# Altium PCB PCB_LED_Board-7.PcbDoc
Units mil, origin at the board's own origin, x right, y up, seen from the top; angles counter-clockwise.
Board outline 1338.58 x 610.24 mil, 2 copper layers (Top Layer, Bottom Layer), stack 63.386 mil thick; 4 components, 5 nets, 15 pads, 0 vias.
Unrouted connection lines stored in the file: 5.
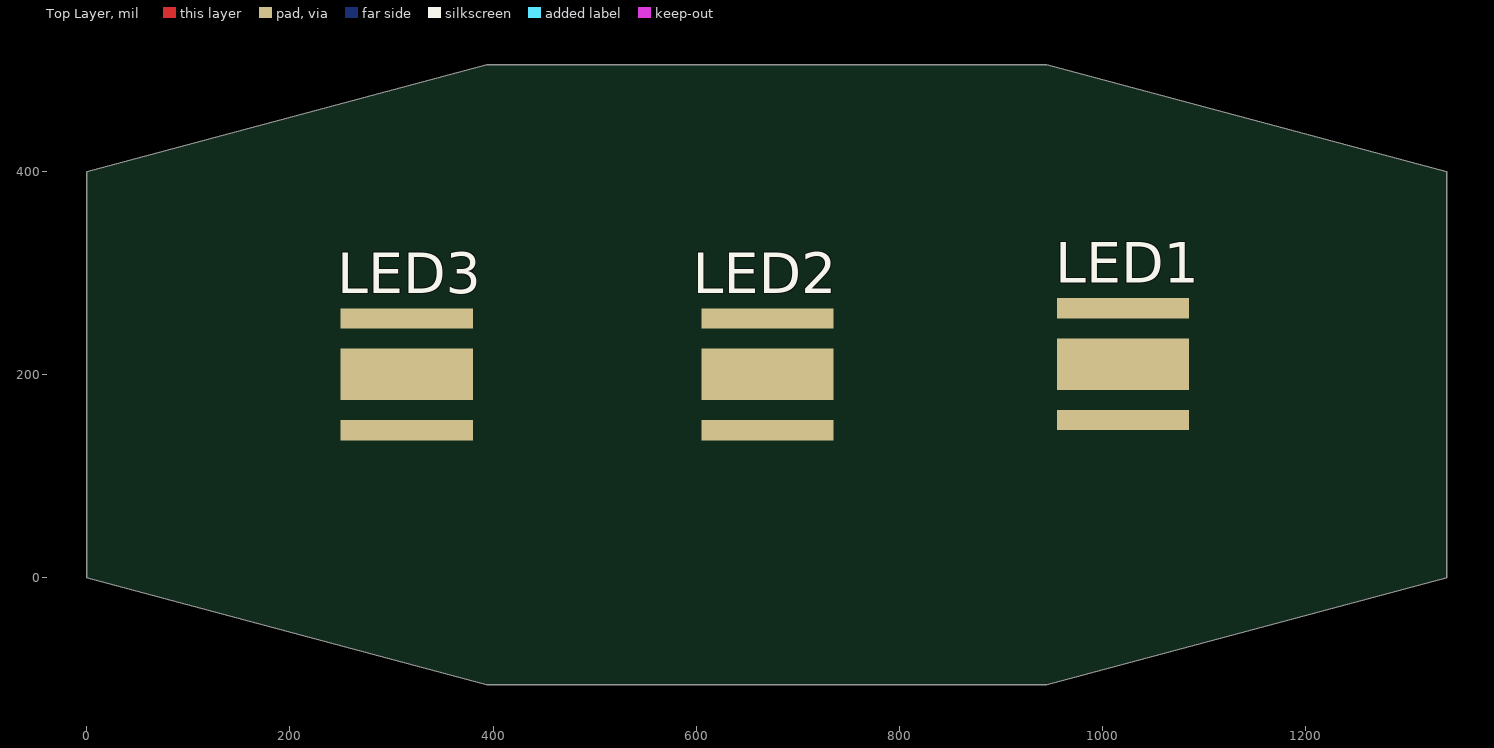
[diagram p0: Top Layer view]
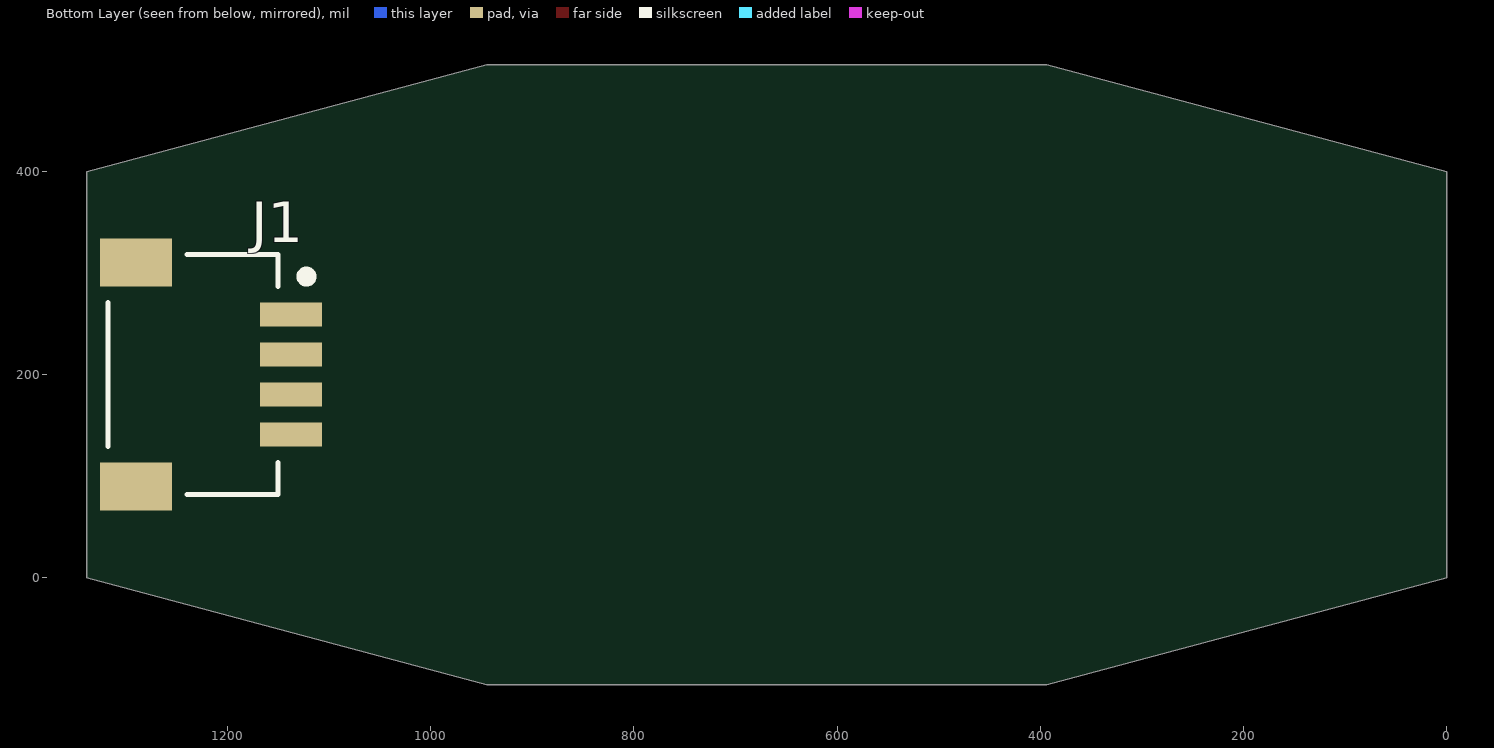
[diagram p1: Bottom Layer view, seen from below]

## Layer stack, top to bottom
Top Solder: solder mask 0.5906, Solder Resist, Dk 3.5
Top Layer: signal copper 1.378
Dielectric 1: prepreg 4.7244, PP-006, Dk 4.1
Aluminium: core 51.1811, FR-4, Dk 4.8
Dielectric 2: prepreg 4.7244, PP-006, Dk 4.1
Bottom Layer: signal copper 1.378
Bottom Solder: solder mask 0.5906, Solder Resist, Dk 3.5

## Board outline
0,0 0,399.25 393.7,504.74 944.88,504.74 1338.58,399.25 1338.58,0 944.88,-105.49 393.7,-105.49

## Design rules (kind name [scope] priority, off if disabled: settings)
Clearance [All] p1: gap=7 ignorepadtopadclearanceinfootprint=FALSE
HoleSize [All] p1: absolutevalues=TRUE maxlimit=1000 minlimit=1 maxpercent=80.000 minpercent=20.000
HoleToHoleClearance [All] p1: gap=2 allowstackedmicrovias=TRUE
MinimumSolderMaskSliver [All] p1: minsoldermaskwidth=2
PolygonConnect [All] p1: connectstyle=Relief reliefconductorwidth=10 reliefentries=4 polygonreliefangle="90 Angle" airgapwidth=10
RoutingVias [All] p1: holewidth=28 width=50 viastyle="Through Hole" minholewidth=28 minwidth=50 maxholewidth=28 maxwidth=50
SilkToSilkClearance [All] p1: silktosilkclearance=2
SilkToSolderMaskClearance [IsPad] p1: minsilkscreentomaskgap=2 clearancetoexposedcopper=TRUE
SolderMaskExpansion [All] p1: expansion=4 istentingtop=FALSE
Width [All] p1: maxlimit=10 minlimit=10 preferedwidth=10
25 further rules are at their usual default settings.

## Components (designator, comment, footprint, x,y, rotation, side; value= is the part's Value field where it differs from the comment)
J1 "SM04B-SRSS-TB" JST_SM04B-SRSS-TB(LF)(SN) 1137.44,199.76 r270 bottom
LED1 "White" SPHWH2L3D30CD4QTP3 1020,210 r270 top
LED2 "RED" SPHRD2L3DH20E7W41J 670,200 r270 top
LED3 "White" SPHWH2L3D30CD4QTP3 315,200 r90 top

## Footprints (in the part's own frame and the unit in brackets; to place one, negate y for a bottom-side part, rotate by r counter-clockwise, add the part's x,y. Pads: shape width x height; smd on the part's side, far side on the other; paste and mask are expansions set on the pad)
JST_SM04B-SRSS-TB(LF)(SN) [mm]
  rect 0.6x1.55 smd: 1(-1.5,0) 2(-0.5,0) 3(0.5,0) 4(1.5,0)
  rect 1.2x1.8 smd: S1(-2.8,-3.875) S2(2.8,-3.875)
  silkscreen extent -3,-4.57 3,0.48, body extent -2.92,-4.57 3.08,0.38, height 2.91
SPHRD2L3DH20E7W41J [mil] "LED LH351H DEEP RED 638NM"
  rect 20x130 smd paste+0 mask+0: 1(-55,0) 2(55,0)
  rect 51x130 smd paste+0 mask+0: 3(0,0)
  body extent -69,-69 69,69, height 80
SPHWH2L3D30CD4QTP3 [mil] "LED LH351B COOL WHITE 5700K 3535"
  rect 20x130 smd paste+0 mask+0: 1(-55,0) 2(55,0)
  rect 51x130 smd paste+0 mask+0: 3(0,0)
  body extent -69,-69 69,69, height 75

## Part data
J1: "Connector Header Surface Mount, Right Angle 4 position 0.039\" (1.00mm)", Digikey Part Number=455-SM04B-SRSS-TBDKR-ND, Manufacturer="JST Sales America Inc.", Package=SMD, ComponentLink1Description="Digikey Link", ComponentLink1URL=https://www.digikey.com/en/products/detail/jst-sales-america-inc/SM04B-SRSS-TB/926710, Item Type=Connector, Manufacturer Part Number=SM04B-SRSS-TB
LED1 LED3: library part SPHWH2L3D30CD4QTP3, "LED Lighting LH351B White, Cool 5700K 2.8V 350mA 120° 1414 (3535 Metric)", Digikey Part Number=1510-2143-6-ND, Manufacturer="Samsung Semiconductor, Inc.", Package="0.138\" L x 0.138\" W (3.50mm x 3.50mm)", ComponentLink1Description="Digikey Link", ComponentLink1URL=https://www.digikey.com/en/products/detail/samsung-semiconductor-inc/SPHWH2L3D30CD4QTP3/6569391, Item Type=LED, Manufacturer Part Number=SPHWH2L3D30CD4QTP3
LED2: library part SPHRD2L3DH20E7W41J, "LED Lighting Color LH351H Red 660nm (650nm ~ 670nm)", Digikey Part Number=1510-SPHRD2L3DH20E7W41JDKR-ND, Manufacturer="Samsung Semiconductor, Inc.", Package="0.138\" L x 0.138\" W (3.50mm x 3.50mm)", ComponentLink1Description="Digikey Link", ComponentLink1URL=https://www.digikey.com/en/products/detail/samsung-semiconductor-inc/SPHRD2L3DH20E7W41J/13617167?s=N4IgTCBcDaIMoAUASAlAImAMgZjUsADAKIDsA6gCwCMAUiALoC%2BQA, Item Type=LED, Manufacturer Part Number=SPHRD2L3DH20E7W41J

## Nets (pads, with @x,y where several pads share a name; then routed paths per layer and width w, separated by ;. In a path a pad name is that pad's centre, name@x,y a point inside that pad or via, vN(x,y) a via of type N, cw(c..) or ccw(c..) an arc to the next point about the centre after c; other vN are vias at no path point)
+3V3: J1.3 LED2.1
LED_R_NEG: J1.4 LED2.2
LED_W_NEG: J1.2 LED3.2
LED_W_POS: J1.1 LED1.1
NetLED1_2: LED1.2 LED3.1
pads on no net: J1.S1 J1.S2 LED1.3 LED2.3 LED3.3

## Silkscreen, mask and mechanical layers (free items; w line width, h text height)
Dimensions:
  lines w0: 246.06,130.73 294.52,130.73 335.4,130.73 383.86,130.73 383.86,179.19 383.86,199.63 383.86,220.06 383.86,268.52 335.4,268.52 294.52,268.52 246.06,268.52 246.06,220.06 246.06,199.63 246.06,179.19 246.06,130.73 ; 249.91,134.67 249.91,154.35 379.83,154.35 379.83,134.67 249.91,134.67 ; 249.91,244.9 249.91,264.59 379.83,264.59 379.83,244.9 249.91,244.9 ; 275.5,174.04 cw(c275.5,199.63) 275.5,225.22 354.24,225.22 cw(c354.24,199.63) 379.83,199.63 cw(c354.24,199.63) 354.24,174.04 351.65,179.22 ccw(c346.36,176.58) 341.08,179.22 338.49,174.04 291.25,174.04 288.65,179.22 ccw(c283.37,176.58) 278.09,179.22 275.5,174.04 ; 600.39,130.73 738.19,130.73 738.19,268.52 600.39,268.52 600.39,130.73 ; 604.24,134.67 604.24,154.35 734.16,154.35 734.16,134.67 604.24,134.67 ; 604.24,199.63 ccw(c629.83,199.63) 629.83,174.04 632.42,179.22 cw(c637.7,176.58) 642.98,179.22 645.58,174.04 692.82,174.04 695.41,179.22 cw(c700.69,176.58) 705.98,179.22 708.57,174.04 ccw(c708.57,199.63) 708.57,225.22 629.83,225.22 ccw(c629.83,199.63) 604.24,199.63 ; 604.24,244.9 734.16,244.9 734.16,264.59 604.24,264.59 604.24,244.9 ; 605.51,146.48 605.51,258.68 cw(c610.24,258.68) 610.24,263.41 728.35,263.41 cw(c728.35,258.68) 733.07,258.68 733.07,146.48 722.44,146.48 722.44,135.85 616.14,135.85 616.14,146.48 605.51,146.48 ; 609.45,175.22 ccw(c644.88,175.22) 644.88,139.78 693.7,139.78 ccw(c693.7,175.22) 729.13,175.22 729.13,224.04 ccw(c693.7,224.04) 693.7,259.47 644.88,259.47 ccw(c644.88,224.04) 609.45,224.04 609.45,175.22 ; 614.17,175.22 ccw(c644.88,175.22) 644.88,144.51 693.7,144.51 ccw(c693.7,175.22) 724.41,175.22 724.41,197.26 614.17,197.26 614.17,175.22 ; 614.17,201.99 614.17,224.04 cw(c644.88,224.04) 644.88,254.74 693.7,254.74 cw(c693.7,224.04) 724.41,224.04 724.41,201.99 614.17,201.99 ; 641.93,162.22 cw(c641.93,164.59) 641.93,166.95 696.65,166.95 cw(c696.65,164.59) 699.02,164.59 cw(c696.65,164.59) 696.65,162.22 641.93,162.22 ; 641.93,232.3 cw(c641.93,234.67) 641.93,237.03 696.65,237.02 cw(c696.65,234.66) 699.02,234.66 cw(c696.65,234.66) 696.65,232.3 641.93,232.3 ; 677.17,148.84 ccw(c679.13,148.84) 681.1,148.84 ccw(c679.13,148.84) 677.17,148.84 ; 677.17,250.41 ccw(c679.13,250.41) 681.1,250.41 ccw(c679.13,250.41) 677.17,250.41 ; 677.56,148.84 ccw(c679.13,148.84) 680.71,148.84 ccw(c679.13,148.84) 677.56,148.84 ; 677.56,250.41 ccw(c679.13,250.41) 680.71,250.41 ccw(c679.13,250.41) 677.56,250.41 ; 954.72,130.73 1003.18,130.73 1044.06,130.73 1092.52,130.73 1092.52,179.19 1092.52,199.63 1092.52,220.06 1092.52,268.52 1044.06,268.52 1003.18,268.52 954.72,268.52 954.72,220.06 954.72,199.63 954.72,179.19 954.72,130.73 ; 958.57,134.67 958.57,154.35 1088.49,154.35 1088.49,134.67 958.57,134.67 ; 958.57,244.9 958.57,264.59 1088.49,264.59 1088.49,244.9 958.57,244.9 ; 984.16,174.04 cw(c984.16,199.63) 984.16,225.22 1062.9,225.22 cw(c1062.9,199.63) 1088.49,199.63 cw(c1062.9,199.63) 1062.9,174.04 1060.31,179.22 ccw(c1055.03,176.58) 1049.74,179.22 1047.15,174.04 999.91,174.04 997.31,179.22 ccw(c992.03,176.58) 986.75,179.22 984.16,174.04
Board Shape:
  the board outline again, w10